# Altium PCB PhotoResistor.PcbDoc
Units mm, origin at the board's own origin, x right, y up, seen from the top; angles counter-clockwise.
Board outline 32.91 x 23.94 mm, 2 copper layers (Top Layer, Bottom Layer); 9 components, 4 nets, 15 pads, 48 vias.
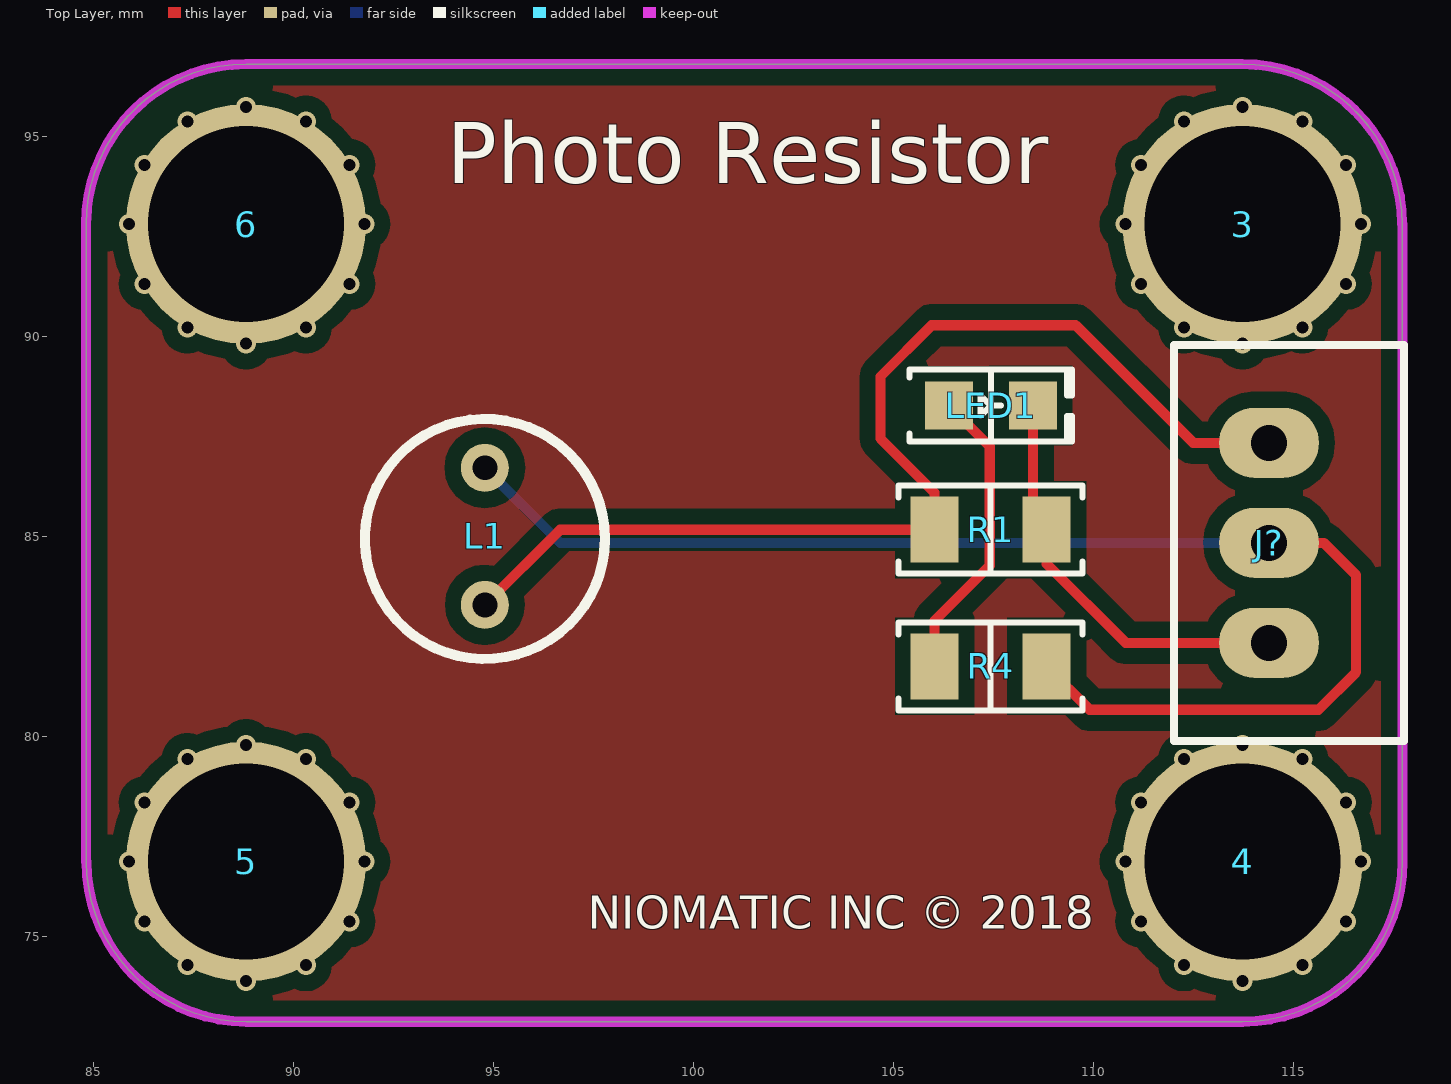
[diagram p0: Top Layer view]
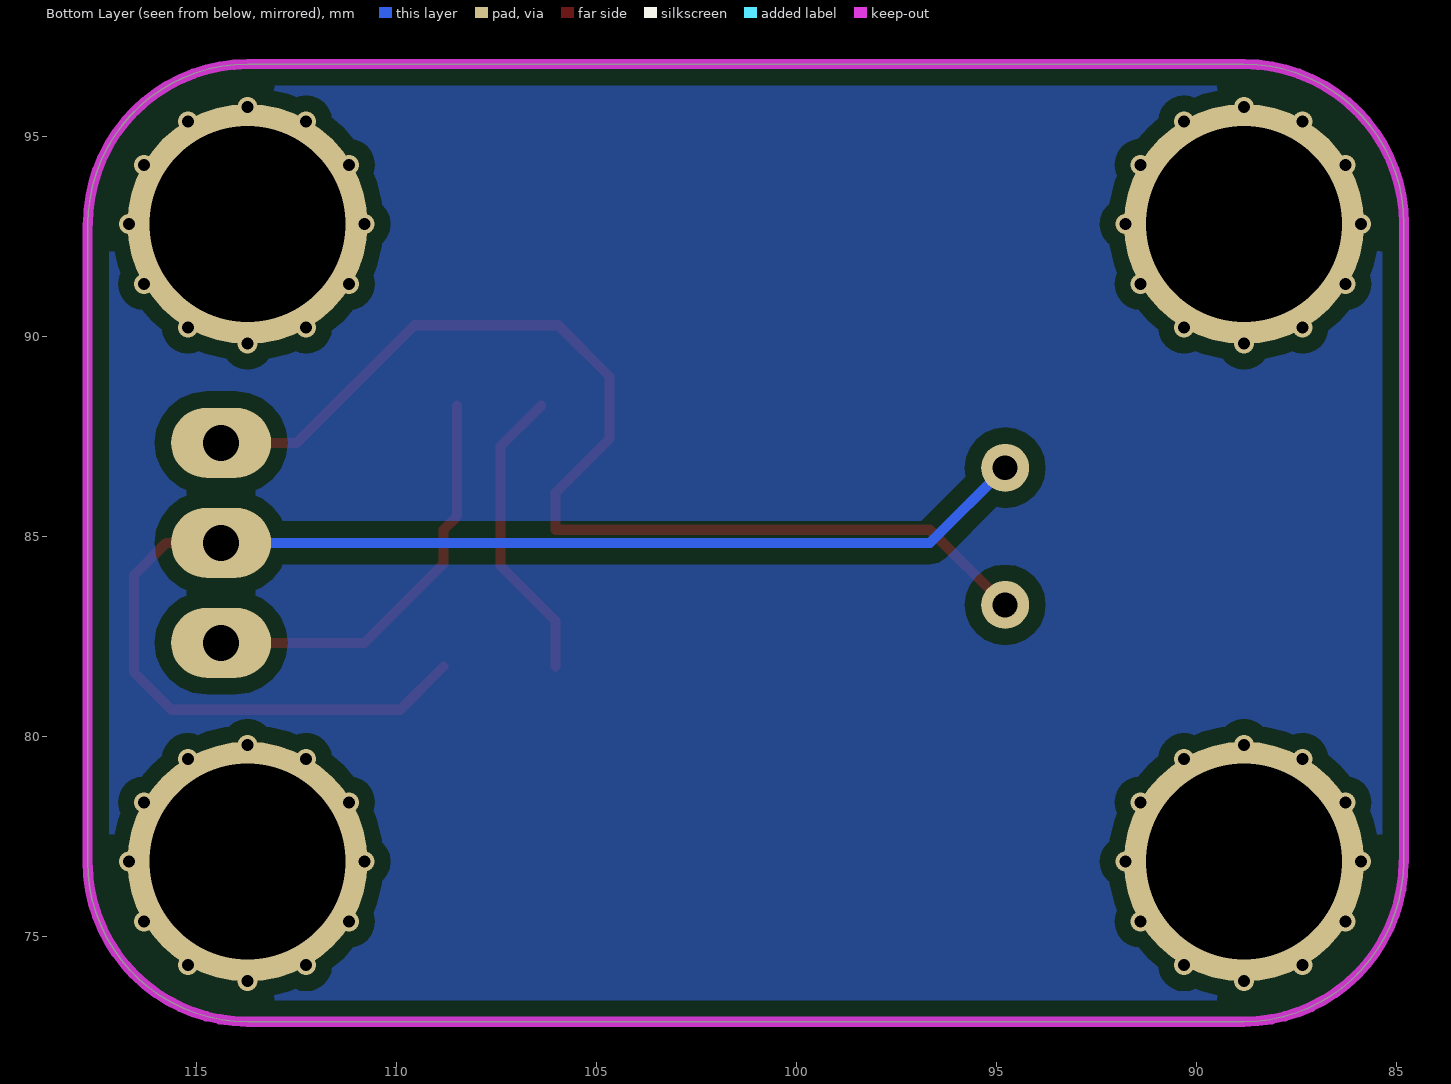
[diagram p1: Bottom Layer view, seen from below]
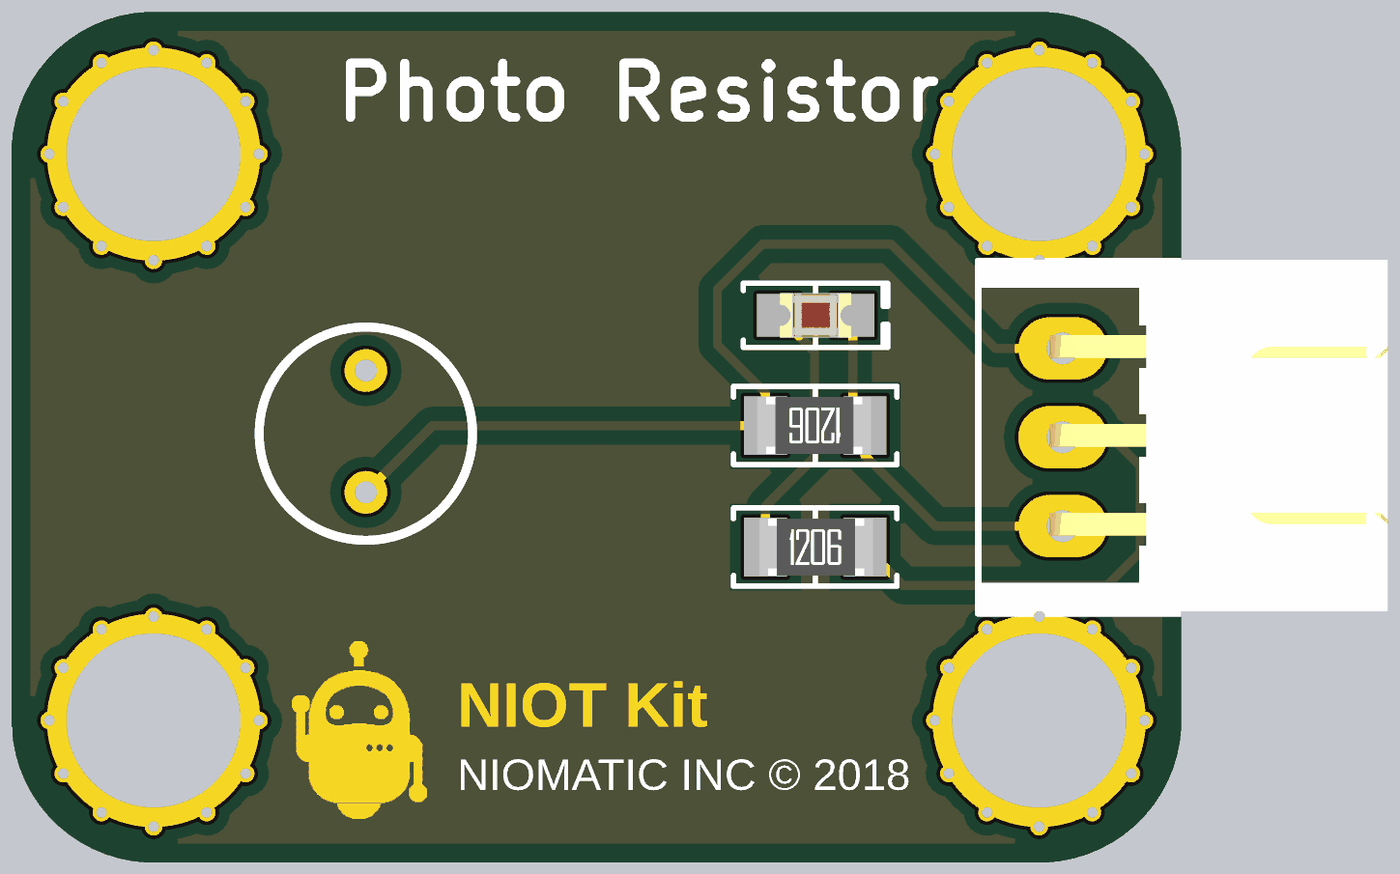
[diagram p2: 3D render of the assembled board from above, using the file's embedded part models]

## Layer stack, top to bottom
Top Solder: solder mask 0.0102, Solder Resist, Dk 3.5
Top Layer: signal copper 0.0356
Dielectric 1: dielectric 0.32, FR-4, Dk 4.8
Bottom Layer: signal copper 0.0356
Bottom Solder: solder mask 0.0102, Solder Resist, Dk 3.5

## Board outline
84.82,76.88 84.82,92.82 cw(c88.82,92.82) 88.82,96.82 113.72,96.82 cw(c113.72,92.82) 117.72,92.82 117.729,92.82 117.729,76.88 cw(c113.729,76.88) 113.729,72.88 88.829,72.88 cw(c88.829,76.88)

## Design rules (kind name [scope] priority, off if disabled: settings)
Clearance [All] p1: gap=0.4 ignorepadtopadclearanceinfootprint=FALSE
PolygonConnect [All] p1: connectstyle=Relief reliefconductorwidth=0.254 reliefentries=4 polygonreliefangle="90 Angle" airgapwidth=0.254
RoomDefinition PhotoResistor [InComponentClass('PhotoResistor')] p1: confinementstyle=ConfineIn formatcopy=TRUE lockcomponents=FALSE outline 178.943,26.924 198.247,26.924 198.247,44.577 178.943,44.577
RoutingVias [All] p1: holewidth=0.711 width=1.27 viastyle="Through Hole" minholewidth=0.711 minwidth=1.27 maxholewidth=0.711 maxwidth=1.27
SolderMaskExpansion [All] p1: expansion=0.102
Width [All] p1: maxlimit=0.254 minlimit=0.254 preferedwidth=0.254
30 further rules are at their usual default settings.

## Classes and differential pairs
component class PhotoResistor: J? L1 LED1 R1 R4

## Components (designator, comment, footprint, x,y, rotation, side; value= is the part's Value field where it differs from the comment)
3 "Lego" "Lego Hole" 113.73,92.82 r90 top
4 "Lego" "Lego Hole" 113.73,76.88 r90 top
5 "Lego" "Lego Hole" 88.819,76.88 r90 top
6 "Lego" "Lego Hole" 88.819,92.82 r90 top
J? "Header" "JST XH B3B-XH-A - RIGHT" 114.392,84.85 r90 top
L1 "PhotoResistor" PhotoResistor 94.79,84.95 r90 top
LED1 "RED" "LED 0805/2012 RED" 107.44,88.28 r0 top value=Green
R1 "1K" "RES 1206/3216" 107.43,85.18 r180 top
R4 "1K" "RES 1206/3216" 107.43,81.76 r0 top

## Footprints (in the part's own frame and the unit in brackets; to place one, negate y for a bottom-side part, rotate by r counter-clockwise, add the part's x,y. Pads: shape width x height; smd on the part's side, far side on the other; paste and mask are expansions set on the pad)
"JST XH B3B-XH-A - RIGHT" [mm]
  oval 1.75x2.5 hole 0.9: 1(-2.5,0) 2(0,0) 3(2.5,0)
  silkscreen extent -4.95,-3.38 4.95,2.38, body extent -4.9,-9.15 5,2.35, height 6.1
"LED 0805/2012 RED" [mm] "Chip Diode, 2-Leads, Body 2.00x1.25mm, IPC Medium Density"
  rect 1.2x1.2 smd: 1(-1.05,0) 2(1.05,0)
  silkscreen extent -2.03,-0.9 2.03,0.9, body extent -1,-0.62 1,0.63, height 0.9
"Lego Hole" [mm]
  round 6 hole 4.9: 0(0,0)
PhotoResistor [mm]
  round 1.2 hole 0.62: 1(-1.651,0) 2(1.778,0)
  silkscreen extent -3,-3 3,3, body extent -2.37,-2.15 2.63,2.15, height 6.5
"RES 1206/3216" [mm] "Chip Resistor, 2-Leads, Body 3.13x1.55mm, IPC Medium Density"
  rect 1.2x1.65 smd: 1(-1.4,0) 2(1.4,0)
  silkscreen extent -2.3,-1.1 2.3,1.1, body extent -1.57,-0.8 1.62,0.8, height 0.6

## Part data
J?: library part "3 Pin"
LED1: library part LED, "Chip LED"
R1 R4: library part Resistor, "SMT Resistor"

## Via types
v1: diameter 0.5, hole 0.3, Top Layer to Bottom Layer, 48 vias

## Nets (pads, with @x,y where several pads share a name; then routed paths per layer and width w, separated by ;. In a path a pad name is that pad's centre, name@x,y a point inside that pad or via, vN(x,y) a via of type N, cw(c..) or ccw(c..) an arc to the next point about the centre after c; other vN are vias at no path point)
A0: J?.3 L1.1 R1.2 | length 27.9
  Top Layer w0.254: L1.1 96.671,85.18 R1.2 106.03,86.106 104.68,87.456 104.68,89.01 105.96,90.29 109.557,90.29 112.497,87.35 J?.3
GND: J?.1 LED1.2 R1.1 | length 10.5
  Top Layer w0.254: LED1.2 108.49,85.52 R1.1 108.83,84.328 110.808,82.35 J?.1
NetLED1_1: LED1.1 R4.1 | length 7.5
  Top Layer w0.254: R4.1 106.03,82.906 107.41,84.286 107.41,87.26 LED1.1
VCC: J?.2 L1.2 R4.2 | length 33.9
  Top Layer w0.254: R4.2 109.91,80.68 115.63,80.68 116.57,81.62 116.57,84.039 115.759,84.85 J?.2
  Bottom Layer w0.254: L1.2 96.668,84.85 J?.2
pads on no net: 3.0 4.0 5.0 6.0
copper on no net:
  other v1: 88.819,73.891 113.73,73.891 87.353,74.291 90.314,74.291 112.264,74.291 115.225,74.291 86.281,75.386 91.408,75.386 111.192,75.386 116.319,75.386 85.889,76.88 91.779,76.88 110.8,76.88 116.69,76.88 86.281,78.361 91.408,78.361 111.192,78.361 116.319,78.361 87.353,79.444 90.314,79.444 112.264,79.444 115.225,79.444 88.819,79.801 113.73,79.801 88.819,89.831 113.73,89.831 87.353,90.231 90.314,90.231 112.264,90.231 115.225,90.231 86.281,91.325 91.408,91.325 111.192,91.325 116.319,91.325 85.889,92.82 91.779,92.82 110.8,92.82 116.69,92.82 86.281,94.301 91.408,94.301 111.192,94.301 116.319,94.301 87.353,95.384 90.314,95.384 112.264,95.384 115.225,95.384 88.819,95.741 113.73,95.741

## Polygon pours and split planes (outlines as drawn)
no net on Top Layer "Top Layer-No Net" (solid, pour order 0): 84.82,76.88 84.82,92.82 cw(c88.82,92.82) 88.82,96.82 113.72,96.82 cw(c113.72,92.82) 117.72,92.82 117.729,92.82 117.729,76.88 cw(c113.729,76.88) 113.729,72.88 88.829,72.88 cw(c88.824,76.885)
no net on Bottom Layer "Top Layer-No Net1" (solid, pour order 1): 84.82,76.88 84.82,92.82 cw(c88.82,92.82) 88.82,96.82 113.72,96.82 cw(c113.72,92.82) 117.72,92.82 117.729,92.82 117.729,76.88 cw(c113.729,76.88) 113.729,72.88 88.829,72.88 cw(c88.824,76.885)

## Keep-outs
Keep-Out Layer:
  lines w0.254: 84.82,76.88 84.82,92.82 cw(c88.82,92.82) 88.82,96.82 113.72,96.82 cw(c113.72,92.82) 117.72,92.82 ; 84.829,76.88 ccw(c88.829,76.88) 88.829,72.88 113.729,72.88 ccw(c113.729,76.88) 117.729,76.88 117.729,92.82

## Silkscreen, mask and mechanical layers (free items; w line width, h text height)
Top Overlay:
  text "Photo Resistor" at 93.83,93.84 h1.52
  text "NIOMATIC INC © 2018" at 97.36,74.929 h1.4
Top Solder:
  drawing of 381 lines, arcs and shapes, not listed
  text "NIOT Kit" at 97.36,76.709 h2